# Altium PCB PCB_X_8266.PcbDoc
Units mm, origin at the board's own origin, x right, y up, seen from the top; angles counter-clockwise.
Board outline 35.05 x 27.18 mm, 2 copper layers (Top Layer, Bottom Layer); 32 components, 28 nets, 130 pads, 57 vias.
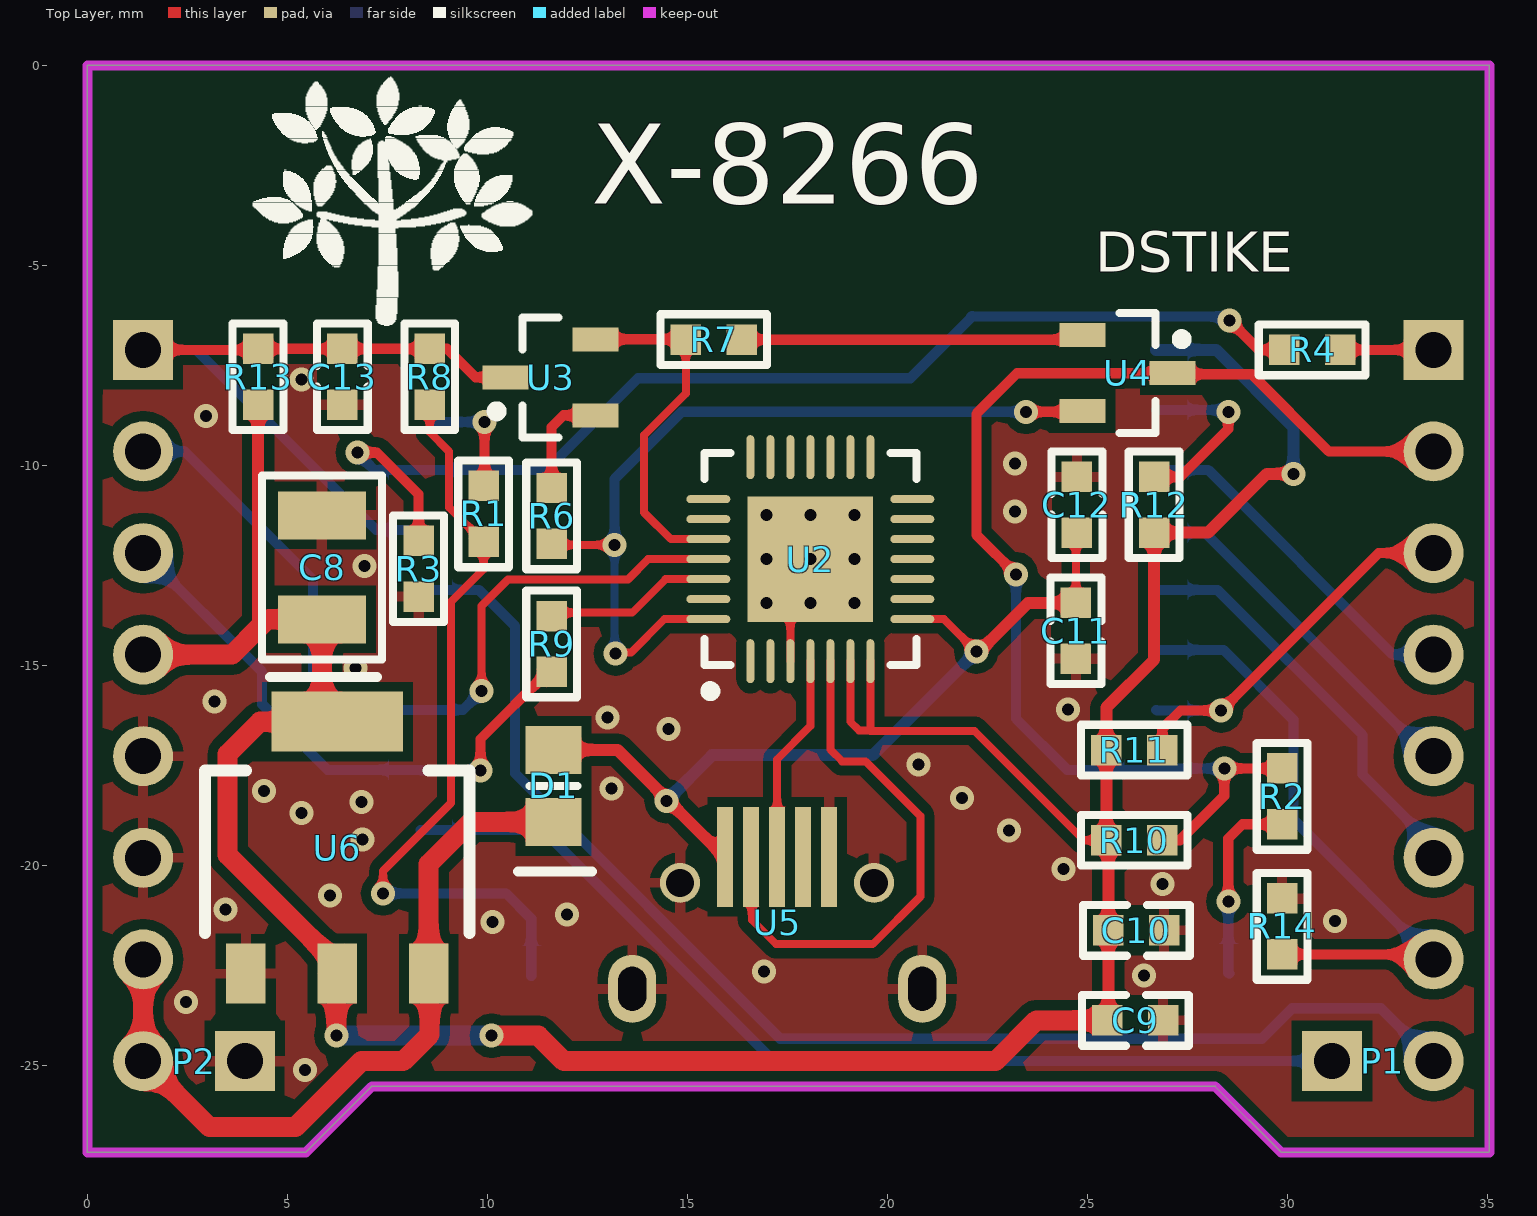
[diagram p0: Top Layer view]
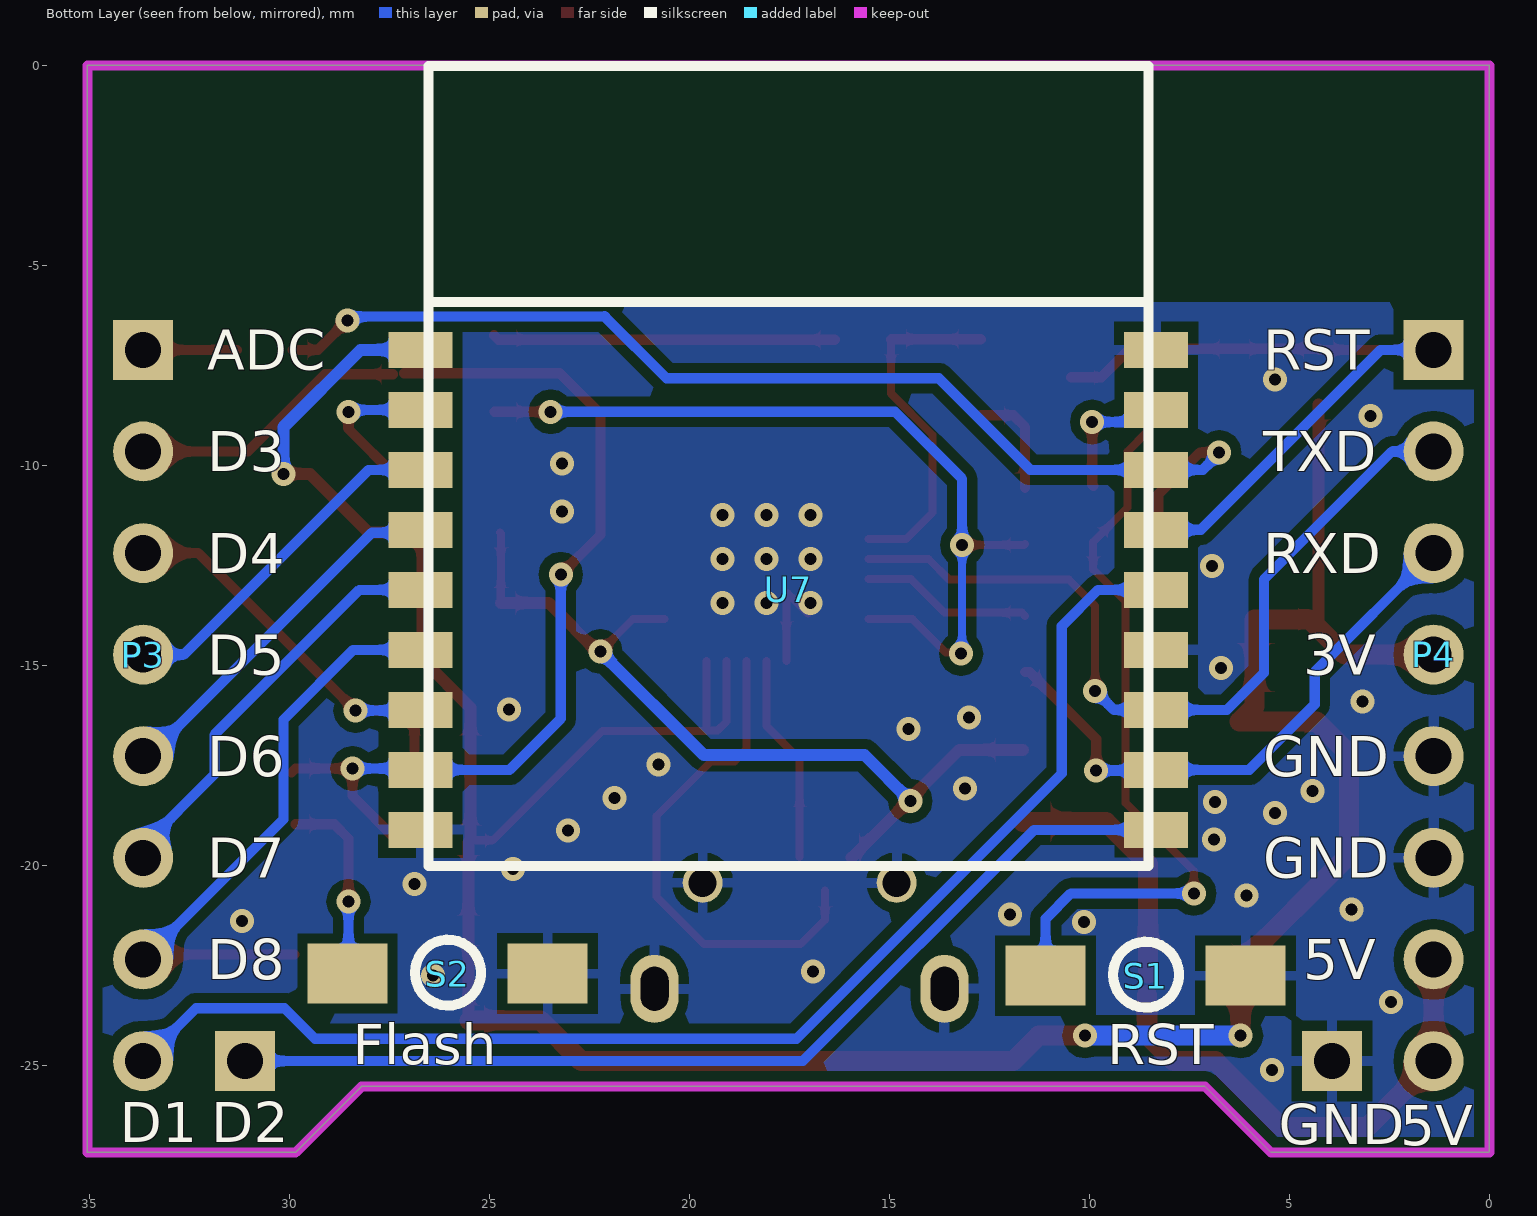
[diagram p1: Bottom Layer view, seen from below]

## Layer stack, top to bottom
Top Solder: solder mask 0.0102, Solder Resist, Dk 3.5
Top Layer: signal copper 0.0356
Dielectric 1: dielectric 0.32, FR-4, Dk 4.8
Bottom Layer: signal copper 0.0356
Bottom Solder: solder mask 0.0102, Solder Resist, Dk 3.5

## Board outline
0,-27.178 0,0 35.052,0 35.052,-27.178 29.845,-27.178 28.194,-25.527 7.112,-25.527 5.461,-27.178

## Design rules (kind name [scope] priority, off if disabled: settings)
Clearance [All] p1: gap=0.254
PolygonConnect PolygonConnect_via [IsVia] p1: connectstyle=Direct reliefconductorwidth=0.254 reliefentries=4 polygonreliefangle="90 Angle" airgapwidth=0.254
PolygonConnect PolygonConnect_GND [HasFootprint('cp2102') And OnLayer('Multi-Layer') vs InNet('GND')] p2: connectstyle=Direct reliefconductorwidth=0.254 reliefentries=4 polygonreliefangle="90 Angle" airgapwidth=0.254
PolygonConnect [All] p3: connectstyle=Relief reliefconductorwidth=0.254 reliefentries=4 polygonreliefangle="90 Angle" airgapwidth=0.254
RoutingVias [All] p1: holewidth=0.711 width=1.27 viastyle="Through Hole" minholewidth=0.711 minwidth=1.27 maxholewidth=0.711 maxwidth=1.27
SolderMaskExpansion [All] p1: expansion=0.102
Width [All] p1: maxlimit=0.5 minlimit=0.2 preferedwidth=0.254
30 further rules are at their usual default settings.

## Components (designator, comment, footprint, x,y, rotation, side; value= is the part's Value field where it differs from the comment)
C8 "100uF" C3528 5.867,-12.548 r90 top
C9 "10uF" C0603 26.924,-23.698 r180 top
C10 "100nF" C0603 26.949,-21.446 r180 top
C11 "10uF" C0603 24.892,-14.859 r90 top
C12 "100nF" C0603 24.562,-10.262 r270 top
C13 "100nF" C0603 6.198,-7.061 r270 top
D1 "1N5819" 1n4148 11.633,-17.196 r270 top
P1 "Header 2" HDR1X2 31.115,-24.892 r0 top
P2 "Header 2" HDR1X2 3.937,-24.892 r180 top
P3 "Header 7" HDR1X7 33.655,-7.112 r270 bottom
P4 "Header 7" HDR1X7 1.397,-7.112 r270 bottom
R1 "0(NC)" R0603 8.28,-11.862 r90 top
R2 "470" R0603 28.245,-18.923 r90 top
R3 "100K" R0603 6.655,-13.233 r90 top
R4 "220K" R0603 29.972,-5.486 r0 top
R6 "12K" R0603 13.233,-10.617 r270 top
R7 "12K" R0603 16.307,-8.484 r180 top
R8 "470" R0603 6.934,-8.433 r90 top
R9 "470" R0603 13.233,-13.818 r270 top
R10 "12K" R0603 25.527,-17.746 r0 top
R11 "12K" R0603 25.527,-15.494 r0 top
R12 "12K" R0603 25.044,-11.633 r90 top
R13 "12K" R0603 2.642,-8.433 r90 top
R14 "12K" R0603 31.496,-20.879 r270 top
S1 "贴片按钮" switch 8.534,-22.708 r270 bottom
S2 "贴片按钮" switch 25.984,-22.657 r270 bottom
U2 "CP2102" CP2102 18.1,-12.371 r90 top
U3 "S8050" s8050 11.659,-7.874 r180 top
U4 "S8050" s8050 25.933,-7.62 r0 top
U5 "MicroUSB-5P" MICROUSB_5S 19.667,-20.437 r180 top
U6 "AMS1117" AMS1117 6.223,-19.126 r0 top
U7 "ESP-WROOM-02" ESP-WROOM-02 8.331,-19.062 r180 bottom

## Footprints (in the part's own frame and the unit in brackets; to place one, negate y for a bottom-side part, rotate by r counter-clockwise, add the part's x,y. Pads: shape width x height; smd on the part's side, far side on the other; paste and mask are expansions set on the pad)
1n4148 [mm]
  rect 1.2x1.4 smd: 1(-0.082,0.022) 2(1.718,0.022)
  silkscreen extent 0.82,-0.87 2.96,0.98, body extent -0.26,-0.68 1.89,0.72, height 0.7
AMS1117 [mil]
  rect 39x59 smd: 1(-89,-141) 3(91,-141)
  rect 38.98x59.06 smd: 2(1,-141)
  rect 129.13x59 smd: 2(1,107.03)
  silkscreen extent -129,-101 131,59
C0603 [mil]
  rect 30x30 smd: 1(1,7) 2(56,7)
  silkscreen extent -24,-18 81,32
C3528 [mm]
  rect 1.2x2.2 smd: 1(-1.3,0) 2(1.3,0)
  silkscreen extent -2.74,-1.5 2.3,1.5
CP2102 [mm]
  oval 1.1x0.2 smd: 1(-2.525,1.525) 2(-2.525,1.025) 3(-2.525,0.525) 4(-2.525,0.025) 5(-2.525,-0.475) 6(-2.525,-0.975) 7(-2.525,-1.475) 15(2.575,-1.475) 16(2.575,-0.975) 17(2.575,-0.475) 18(2.575,0.025) 19(2.575,0.525) 20(2.575,1.025) 21(2.575,1.525)
  oval 0.2x1.1 smd: 8(-1.475,-2.525) 9(-0.975,-2.525) 10(-0.475,-2.525) 11(0.025,-2.525) 12(0.525,-2.525) 13(1.025,-2.525) 14(1.525,-2.525) 22(1.525,2.575) 23(1.025,2.575) 24(0.525,2.575) 25(0.025,2.575) 26(-0.475,2.575) 27(-0.975,2.575) 28(-1.475,2.575)
  rect 3.13x3.13 smd: 29(0.025,0.025)
  silkscreen extent -3.4,-2.62 2.68,2.68, body extent -2.47,-2.47 2.53,2.53, height 1
ESP-WROOM-02 [mm]
  rect 1.6x0.9 smd: 0(-18.39,11.95) 1(-18.39,10.45) 2(-18.39,8.95) 3(-18.39,7.45) 4(-18.39,5.95) 5(-18.39,4.45) 6(-18.39,2.95) 7(-18.39,1.45) 8(-18.39,-0.05) 9(0,-0.05) 10(0,1.45) 11(0,2.95) 12(0,4.45) 13(0,5.95) 14(0,7.45) 15(0,8.95) 16(0,10.45) 17(0,11.95)
  silkscreen extent -18.19,-0.95 -0.19,19.05
HDR1X2 [mm] "Connector; Header; 2 Position"
  rect 1.5x1.5 hole 0.9: 1(0,0)
  round 1.5 hole 0.9: 2(2.54,0)
HDR1X7 [mm] "Connector; Header; 7 Position"
  rect 1.5x1.5 hole 0.9: 1(0,0)
  round 1.5 hole 0.9: 2(2.54,0) 3(5.08,0) 4(7.62,0) 5(10.16,0) 6(12.7,0) 7(15.24,0)
MICROUSB_5S [mm]
  rect 0.4x2.5 smd: 1(3.721,-0.65) 2(3.071,-0.65) 3(2.421,-0.65) 4(1.771,-0.65) 5(1.121,-0.65)
  round 1 hole 0.7 unplated: 6(0,0) 7(4.85,0)
  oval 1.2x1.7 hole 0.7 slot 1.1 at 90 deg unplated: 8(-1.205,2.65) 9(6.045,2.65)
R0603 [mil]
  rect 30x30 smd: 1(-2,-64) 2(53,-64)
  silkscreen extent -27,-89 78,-39
s8050 [mm]
  rect 1.15x0.6 smd: 1(-1.049,0.874) 2(-1.049,-1.026) 3(1.201,-0.076)
  silkscreen extent -0.12,-1.58 1.55,1.42, body extent -0.62,-1.58 0.78,1.42, height 1.1
switch [mm]
  rect 1.5x2 smd: 1(0.051,2.438) 2(0.051,-2.562)
  silkscreen extent -0.8,-0.88 0.85,0.77

## Part data
C8 C9 C10 C11 C12 C13: library part C0603, "贴片电容"
D1: library part 1N4148, "二极管"
P1 P2: "Header, 2-Pin"
P3 P4: "Header, 7-Pin"
R1 R2 R3 R4 R6 R7 R8 R9 R10 R11 R12 R13 R14: library part R0603, "贴片电阻"
S1 S2: library part Switch, "3*4*2mm开关"
U2: "USB转串口芯片"
U3 U4: "三极管"
U5: library part MicroUSB_5S, "Micro USB插脚"
U6: "3.3V稳压芯片"
U7: "WiFiоƬ"

## Free pads (board coordinates)
  round 3 on Keep-Out: ""(2.54,-2.54) ""(32.512,-2.54)

## Via types
v1: diameter 0.6, hole 0.3, Top Layer to Bottom Layer, tented both sides, 47 vias
v2: diameter 0.6, hole 0.3, Top Layer to Bottom Layer, 10 vias

## Nets (pads, with @x,y where several pads share a name; then routed paths per layer and width w, separated by ;. In a path a pad name is that pad's centre, name@x,y a point inside that pad or via, vN(x,y) a via of type N, cw(c..) or ccw(c..) an arc to the next point about the centre after c; other vN are vias at no path point)
ADC: R3.2 R4.1 U7.15 | length 28.4
  Top Layer w0.254: v1(6.756,-9.677) 7.239,-9.677 8.28,-10.719 R3.2 ; v1(28.55,-6.375) 29.286,-7.112 R4.1
  Bottom Layer w0.254: v1(6.756,-9.677) 6.756,-9.703 7.166,-10.112 U7.15 11.478,-10.112 13.767,-7.823 20.574,-7.823 22.116,-6.281 ; 22.098,-6.281 22.116,-6.281 ; 22.123,-6.274 22.116,-6.281 ; v1(28.55,-6.375) 28.455,-6.281 22.116,-6.281
ADC_EX: P3.1 R4.2 | length 2.8
  Top Layer w0.254: R4.2 P3.1 P3.1@33.299,-6.756
D_N: U2.5 U5.2 | length 12.9
  Top Layer w0.2: U5.2@16.612,-20.625 16.612,-21.361 17.221,-21.971 19.634,-21.971 20.828,-20.777 20.828,-18.771 19.456,-17.399 18.872,-17.399 18.575,-17.102 U2.5
D_P: U2.4 U5.3 | length 5.2
  Top Layer w0.2: U5.3 17.247,-17.348 18.075,-16.52 U2.4
DTR: R6.2 U2.28 U4.2 | length 21
  Top Layer w0.2: R6.2 11.633,-11.989 v1(13.183,-11.989) ; v1@13.209,-14.708 v1(13.208,-14.707) 13.232,-14.683 13.588,-14.683 14.424,-13.846 U2.28 ; U4.2@24.869,-8.661 U4.2
  Top Layer w0.254: v1(23.47,-8.661) U4.2@24.869,-8.661
  Bottom Layer w0.2: v1(13.183,-11.989) 13.183,-14.681 v1(13.208,-14.707)
  Bottom Layer w0.254: v1(13.183,-11.989) 13.183,-10.338 14.859,-8.661 v1(23.47,-8.661)
EN: R12.2 U7.1 | length 4.6
  Top Layer w0.254: R12.2 27.33,-10.287 28.524,-9.093 v1(28.524,-8.661)
  Bottom Layer w0.2: v1@28.475,-8.612 v1(28.524,-8.661)
  Bottom Layer w0.254: U7.1 v1@28.475,-8.612
GND: C8.2 C9.1 C10.1 C11.1 C12.1 C13.2 P2.1 P4.5 P4.6 R3.1 R14.1 S1.1 S2.1 U2.3 U2.29 U5.5 U5.6 U5.7 U5.8 U5.9 U6.1 U7.8 U7.12 U7.17 | length 2.4
  Top Layer w0.2: U2.29@17.038,-13.708 17.538,-13.208 17.575,-13.245 U2.3
  other v1: 5.436,-25.121 2.464,-23.419 26.416,-22.758 16.916,-22.657 10.135,-21.412 31.191,-21.387 11.989,-21.234 3.454,-21.107 6.071,-20.752 26.873,-20.472 24.409,-20.091 6.883,-19.355 23.038,-19.126 5.359,-18.694 6.858,-18.415 21.869,-18.313 4.42,-18.136 13.106,-18.085 20.777,-17.475 14.529,-16.586 13.005,-16.307 24.511,-16.104 3.175,-15.9 6.706,-15.062 6.934,-12.522 23.19,-11.151 23.19,-9.957 2.972,-8.763 5.359,-7.849
  other v2: 16.975,-13.446 18.075,-13.446 19.175,-13.446 16.975,-12.346 18.075,-12.346 19.175,-12.346 16.975,-11.246 18.075,-11.246 19.175,-11.246
GPIO0: P3.2 R2.2 R10.2 U4.3 U7.7 | length 30.4
  Top Layer w0.254: v1(23.216,-12.725) 22.225,-11.735 22.225,-8.712 23.241,-7.696 U4.3 ; R10.2 27.313,-19.372 28.423,-18.263 v1(28.423,-17.577) 29.845,-17.577 R2.2@29.947,-17.678 ; U4.3@27.407,-7.722 29.108,-7.722 31.039,-9.652 P3.2
  Bottom Layer w0.254: v1(23.216,-12.725) 23.216,-16.332 24.495,-17.612 U7.7 26.756,-17.577 v1(28.423,-17.577)
GPIO2: P3.3 R11.2 U7.6 | length 10.8
  Top Layer w0.254: R11.2 26.873,-16.586 27.33,-16.129 v1(28.346,-16.129) 32.283,-12.192 P3.3
  Bottom Layer w0.254: U7.6 26.738,-16.129 v1(28.346,-16.129)
GPIO4: P1.1 U7.9 | length 25.2
  Bottom Layer w0.254: U7.9 11.383,-19.112 17.163,-24.892 P1.1
GPIO5: P1.2 U7.13 | length 33
  Bottom Layer w0.254: U7.13 9.785,-13.112 10.693,-14.021 10.693,-17.704 17.323,-24.333 29.362,-24.333 30.124,-23.571 32.334,-23.571 P1.2
GPIO12: P3.5 U7.3 | length 9.3
  Bottom Layer w0.254: U7.3 26.793,-11.684 27.94,-11.684 33.528,-17.272 P3.5
GPIO13: P3.6 U7.4 | length 10.5
  Bottom Layer w0.254: U7.4 28.25,-13.112 31.877,-16.739 31.877,-17.729 33.655,-19.507 P3.6
GPIO14: P3.4 U7.2 | length 8.8
  Bottom Layer w0.254: U7.2 28.019,-10.112 32.639,-14.732 P3.4
GPIO15: P3.7 R14.2 U7.5 | length 15.4
  Top Layer w0.254: R14.2 33.528,-22.225 P3.7
  Bottom Layer w0.254: U7.5 28.404,-14.612 30.15,-16.358 30.15,-18.847 P3.7
GPIO16: R1.2 U7.16 | length 3.3
  Top Layer w0.254: R1.2 9.931,-10.49 v1(9.931,-8.915)
  Bottom Layer w0.254: U7.16 8.635,-8.915 v1(9.931,-8.915)
NetR1_1: R1.1 R8.1 S1.2 | length 19.4
  Top Layer w0.2: v1(7.391,-20.701) 7.391,-20.142 9.093,-18.44 9.093,-13.411 9.906,-12.598 R1.1 9.042,-11.049 9.042,-9.652 8.56,-9.169 8.56,-8.496 R8.1@8.776,-8.496
  Bottom Layer w0.254: v1(7.391,-20.701) 10.465,-20.701 11.096,-21.332 S1.2
NetR2_1: R2.1 S2.2 | length 4.9
  Top Layer w0.254: v1(28.524,-20.904) 28.524,-19.329 28.88,-18.974 R2.1@29.845,-18.974
  Bottom Layer w0.254: v1(28.524,-20.904) 28.524,-22.686 S2.2
NetR6_1: R6.1 U3.1 | length 2.7
  Top Layer w0.254: R6.1 11.608,-9.042 11.902,-8.748 U3.1
NetR7_1: R7.1 U4.1 | length 8.6
  Top Layer w0.254: R7.1 24.773,-6.858 U4.1
NetR9_1: R9.1 U2.26 | length 4.3
  Top Layer w0.2: R9.1 11.692,-13.683 13.622,-13.683 14.459,-12.846 U2.26
NRST: C13.1 P4.1 R8.2 R13.2 U3.3 U7.14 | length 18.2
  Top Layer w0.254: P4.1 4.242,-7.112 R13.2 C13.1 8.547,-7.087 R8.2@8.56,-7.099 ; R8.2 8.992,-7.087 9.703,-7.798 U3.3
  Bottom Layer w0.254: P4.1 2.718,-7.112 7.218,-11.612 U7.14
RTS: R7.2 U2.24 U3.2 | length 8.9
  Top Layer w0.2: R7.2 14.961,-8.204 13.919,-9.246 13.919,-11.176 14.589,-11.846 U2.24
  Top Layer w0.254: U3.2 14.95,-6.848 R7.2
RXD: P4.3 R9.2 U7.10 | length 14.4
  Top Layer w0.254: v1(9.83,-17.628) 9.83,-16.84 11.506,-15.164 R9.2
  Bottom Layer w0.254: P4.3 4.369,-15.164 4.369,-15.977 6.004,-17.612 U7.10 8.347,-17.628 v1(9.83,-17.628)
TXD: P4.2 U2.25 U7.11 | length 21
  Top Layer w0.2: v1(9.855,-15.646) 9.855,-13.513 10.516,-12.852 13.513,-12.852 14.019,-12.346 U2.25
  Bottom Layer w0.254: P4.2 2.438,-9.652 5.639,-12.852 5.639,-15.189 6.562,-16.112 U7.11 9.39,-16.112 v1(9.855,-15.646)
VCC: C8.1 C9.2 C10.2 P4.4 R10.1 R11.1 R12.1 R13.1 U2.6 U2.7 U6.2 U7.0 | length 77.4
  Top Layer w0.2: U2.6 19.075,-16.408 19.295,-16.628 19.575,-16.628 ; U2.7 19.575,-16.628 ; R10.1 24.909,-19.372 22.174,-16.637 19.583,-16.637 19.575,-16.628
  Top Layer w0.3: R13.1 4.267,-13.995 4.31,-14.038 ; C9.2 25.527,-23.851 C10.2 25.527,-19.423 R10.1 R11.1 25.476,-16.053 26.67,-14.859 R12.1 28.016,-11.684 29.489,-10.211 v1(30.15,-10.211)
  Top Layer w0.5: P4.4 3.616,-14.732 4.31,-14.038 4.5,-13.848 C8.1 5.867,-16.027 6.248,-16.408 4.319,-16.408 3.505,-17.221 3.505,-19.736 6.248,-22.479 6.248,-22.708 6.223,-22.733 v1(6.223,-24.257) ; v1(10.109,-24.257) 11.274,-24.257 11.913,-24.896 22.704,-24.896 23.724,-23.876 C9.2
  Bottom Layer w0.3: U7.0 28.219,-7.112 30.15,-9.042 v1(30.15,-10.211)
  Bottom Layer w0.5: v1(6.223,-24.257) v1(10.109,-24.257)
VCC_5V: D1.2 P2.2 P4.7 U6.3 | length 18.6
  Top Layer w0.5: P4.7 P2.2 3.052,-26.547 5.2,-26.547 6.851,-24.896 7.895,-24.896 8.56,-24.232 U6.3@8.56,-23.241 ; U6.3 8.534,-19.964 9.585,-18.914 D1.2
VCC_USB: C11.2 C12.2 D1.1 U2.8 U5.1 | length 21.5
  Top Layer w0.2: U2.8 21.415,-13.846 v1(22.225,-14.656) ; C11.2 24.714,-11.709 C12.2
  Top Layer w0.3: D1.1 13.253,-17.114 U5.1@15.947,-19.807 ; v1(22.225,-14.656) 22.225,-14.732 23.52,-13.437 C11.2
  Bottom Layer w0.3: v2(14.478,-18.39) 15.621,-17.247 19.634,-17.247 v1(22.225,-14.656)
pads on no net: U2.1 U2.2 U2.9 U2.10 U2.11 U2.12 U2.13 U2.14 U2.15 U2.16 U2.17 U2.18 U2.19 U2.20 U2.21 U2.22 U2.23 U2.27 U5.4

## Polygon pours and split planes (outlines as drawn)
GND on Top Layer "Top Layer-No Net" (solid, remove dead copper, pour order 190): -1.27,0.635 37.186,0.635 37.414,0.864 38.075,0.203 38.075,-29.413 -0.533,-29.413 -1.194,-28.753
GND on Top Layer "Top Layer-No Net" (solid, remove dead copper, pour order 184): -2.134,1.067 36.703,1.067 36.703,-29.312 36.627,-29.388 36.195,-28.956 -1.397,-28.956
GND on Bottom Layer "Top Layer-No Net" (solid, remove dead copper, pour order 188): -1.88,1.829 -1.803,1.753 38.76,1.753 38.76,-29.921 39.116,-30.277 37.998,-29.159 -0.737,-29.159

## Keep-outs
Keep-Out Layer:
  the board outline again, w0.254

## Other copper
Bottom Layer:
  pour cut-out: 8.509,-5.918 8.534,-5.944 35.052,-5.944 35.052,0 0,0 0,-5.918

## Silkscreen, mask and mechanical layers (free items; w line width, h text height)
Top Overlay:
  drawing of 1036 lines, arcs and shapes, not listed
  text "X-8266" at 12.598,-3.454 h2
  text "DSTIKE" at 25.197,-5.156 h1
Bottom Overlay:
  text "RST" at 5.651,-7.612 h1
  text "ADC" at 32.055,-7.612 h1
  text "TXD" at 5.651,-10.152 h1
  text "D3" at 32.055,-10.152 h1
  text "RXD" at 5.651,-12.692 h1
  text "D4" at 32.055,-12.692 h1
  text "3V" at 4.651,-15.232 h1
  text "D5" at 32.055,-15.232 h1
  text "GND" at 5.651,-17.772 h1
  text "D6" at 32.055,-17.772 h1
  text "GND" at 5.651,-20.312 h1
  text "D7" at 32.055,-20.312 h1
  text "5V" at 4.651,-22.852 h1
  text "D8" at 32.055,-22.852 h1
  text "RST" at 9.55,-24.968 h1
  text "Flash" at 28.423,-24.968 h1
  text "D2" at 31.953,-26.924 h1
  text "D1" at 34.239,-26.924 h1
  text "GND" at 5.27,-26.967 h1
  text "5V" at 2.23,-26.992 h1